# EAGLE board converter (EAGLE 7.2.0)
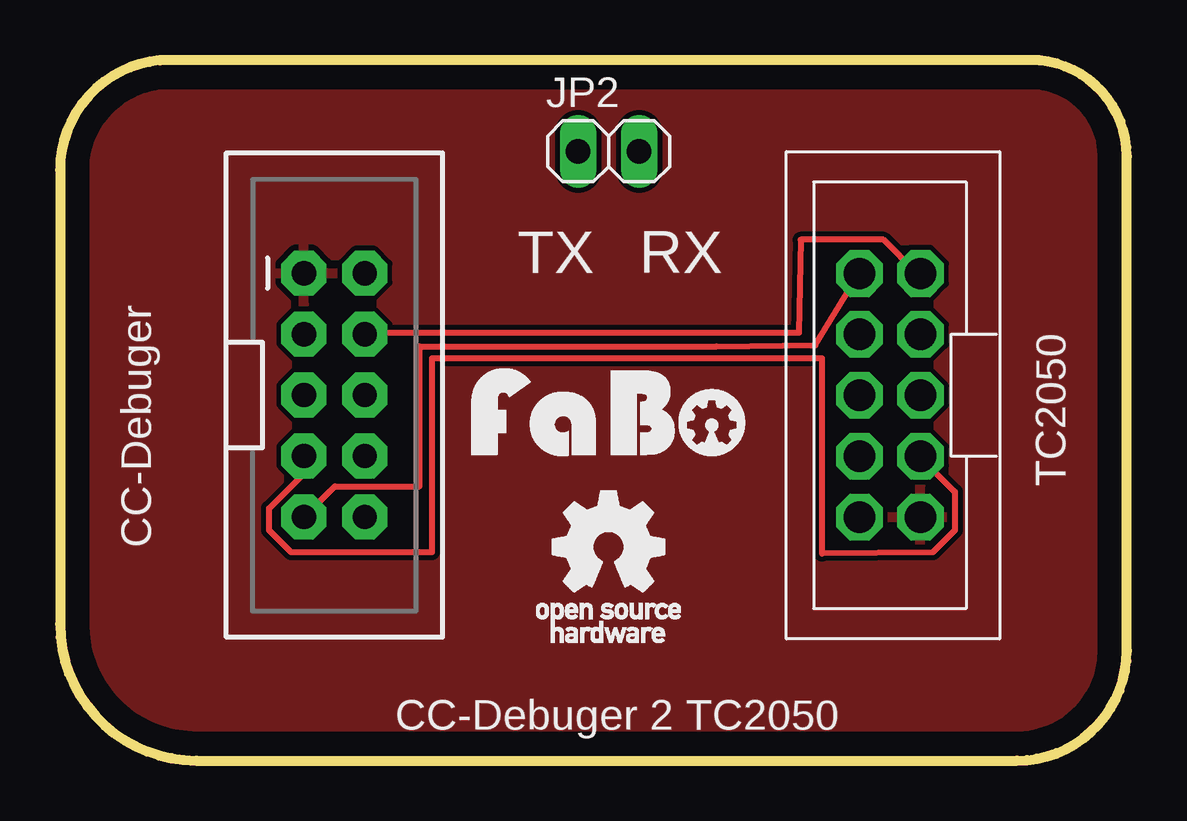
[diagram p0: board, top side]
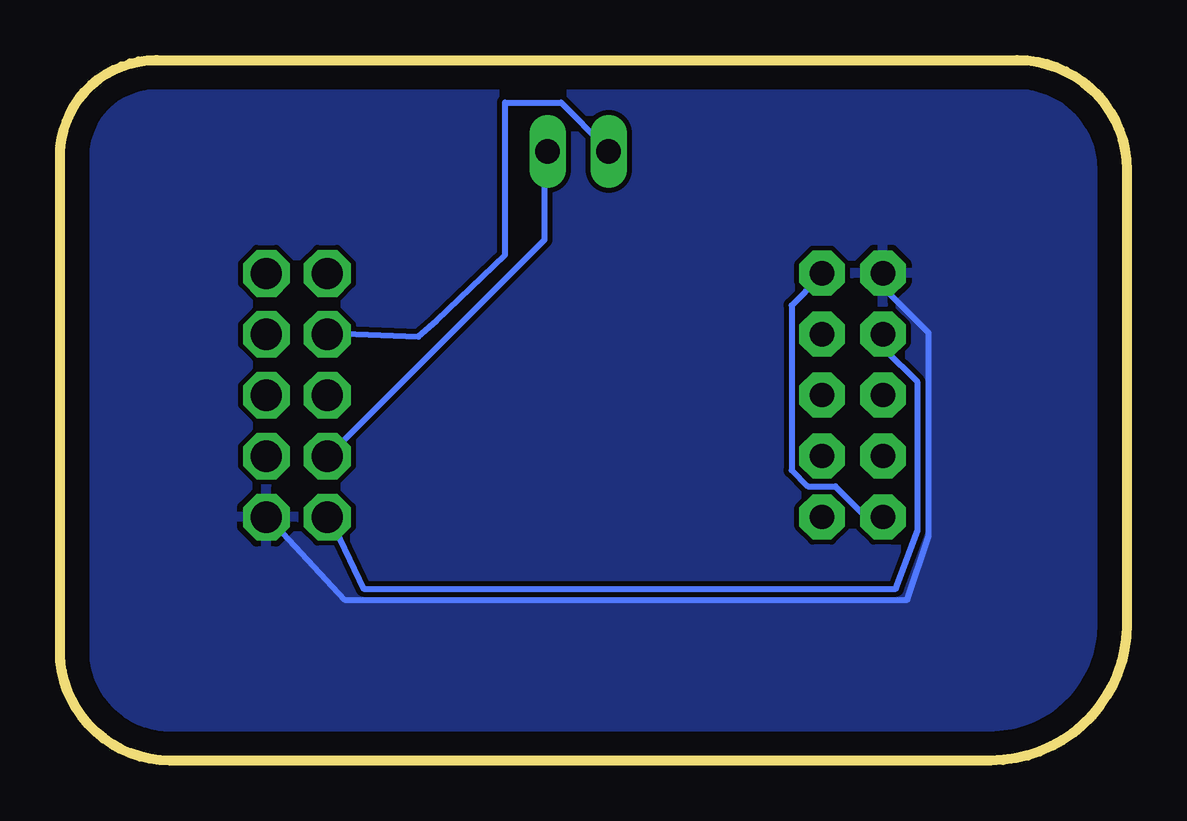
[diagram p1: board, bottom side, seen from below]

Size 44.45 x 29.21 mm. Coordinates in mm from the lower left corner, seen from the top.
Outline: 40.43,29.21 4.58,29.21 arc90 0,24.63 0,5.68 arc90 5.68,0 39.87,0 arc90 44.45,4.58 44.45,25.19 arc90 40.43,29.21
Copper layers (1*16): Top 0.035mm / dielectric 1.5mm / Bottom 0.035mm
Design rules "default": minimum track width 10mil, minimum drill 24mil, track to track 8mil, track to pad 8mil, pad to pad 8mil, via to via 8mil, smd to smd 8mil, copper to edge 40mil, drill to drill 8mil, minimum pad ring 10mil, minimum via ring 8mil, stop-mask expansion 4mil, vias tented up to drill 0mil, thermal gap 10mil

## Footprints (pad centres in the part's own frame; a part is rotated, then mirrored left to right if it is on the bottom)
2X5-SHROUDED = drill 1.016 pad 1.88 octagon: 1 -1.27,5.08; 2 1.27,5.08; 3 -1.27,2.54; 4 1.27,2.54; 5 -1.27,0; 6 1.27,0; 7 -1.27,-2.54; 8 1.27,-2.54; 9 -1.27,-5.08; 10 1.27,-5.08
1X02 = drill 1.016 long: 1 -1.27,0; 2 1.27,0
TC-2050-SOCKET = drill 1.3 octagon: 1 1.27,-8.89; 2 -1.27,1.27; 3 -1.27,-8.89; 4 1.27,1.27; 5 1.27,-6.35; 6 -1.27,-1.27; 7 -1.27,-6.35; 8 1.27,-1.27; 9 1.27,-3.81; 10 -1.27,-3.81

## Placement (x,y rotation side)
JP1  M05X2SHD  [2X5-SHROUDED]  11.43,15.24 0 top
JP2  [1X02]  22.86,25.4 0 top
U$1  [LOGO_FABO_M]  22.86,12.7 0 top
U$2  [LOGO_OSHW_T_M]  22.86,8.89 0 top
U$4  TC-2050-SOCKET  [TC-2050-SOCKET]  34.58,19.04 0 top

## Library data of the parts
JP1 = SparkFun-Connectors
JP2 = pinhead
U$1 = FaBo
U$2 = GClue
U$4 = GClue-Debbuger

## Nets
3.3V: JP1.2 JP1.9 U$4.2
CSN: JP1.5
DEBUG_CLOCK: JP1.4 U$4.4
DEBUG_DATA: JP1.3 U$4.3
GND: JP1.1 U$4.1
MISO: JP1.10
MOSI: JP1.8
RESET: JP1.7 U$4.5
RX: JP2.2 U$4.7
SCLK: JP1.6
TX: JP2.1 U$4.6

## Tracks (layer width: path | path; a pad name or v marks a point on that pad's centre or on a via)
3.3V
  Top 0.254: U$4.2 33.17,20.12 31.47,17.32 27.36,17.27 14.99,17.27 14.99,11.43 11.45,11.43 10.31,10.29 JP1.9
  Bottom 0.254: JP1.9 10.31,10.29 11,10.29 12.14,11.43 13.28,11.43 13.97,12.12 13.97,18.97 12.83,20.12 JP1.2
DEBUG_CLOCK
  Top 0.254: JP1.4 12.83,17.83 30.79,17.83 30.86,21.72 34.31,21.72 35.69,20.34 U$4.4
DEBUG_DATA
  Bottom 0.254: JP1.3 10.08,17.6 10.08,17.14 8.71,15.77 8.71,9.6 9.63,7.16 31.8,7.16 33.17,10.06 U$4.3
GND
  Bottom 0.254: JP1.1 10.08,20.12 10.08,19.66 8.25,17.83 8.25,9.37 9.14,6.71 32.59,6.71 35.69,10.06 U$4.1
  pour Top: 0,0 45.72,0 45.72,30.48 0,30.48
  pour Bottom: 0,0 45.72,0 45.72,30.48 0,30.48
RESET
  Top 0.254: JP1.7 10.08,12.57 10.08,11.89 8.71,10.52 8.71,9.6 9.63,8.69 15.49,8.69 15.49,16.76 31.75,16.76 31.75,8.64 36.37,8.69 37.29,9.6 37.29,11.2 35.92,12.57 U$4.5
RX
  Bottom 0.254: JP2.2 24.26,25.38 24.26,21.72 33.17,12.8 U$4.7
TX
  Bottom 0.254: JP2.1 21.74,25.6 23.57,27.43 25.91,27.43 25.91,21.08 28.75,18.34 29.52,17.68 33.17,17.83 U$4.6

## Text on the board
tPlace: TX | RX | TC2050 | CC-Debuger | CC-Debuger 2 TC2050